# Altium PCB PCB1.PcbDoc
Units mil, origin at the board's own origin, x right, y up, seen from the top; angles counter-clockwise.
Board outline 6000 x 4000 mil, 2 copper layers (Top Layer, Bottom Layer); 22 components, 13 nets, 63 pads, 0 vias.
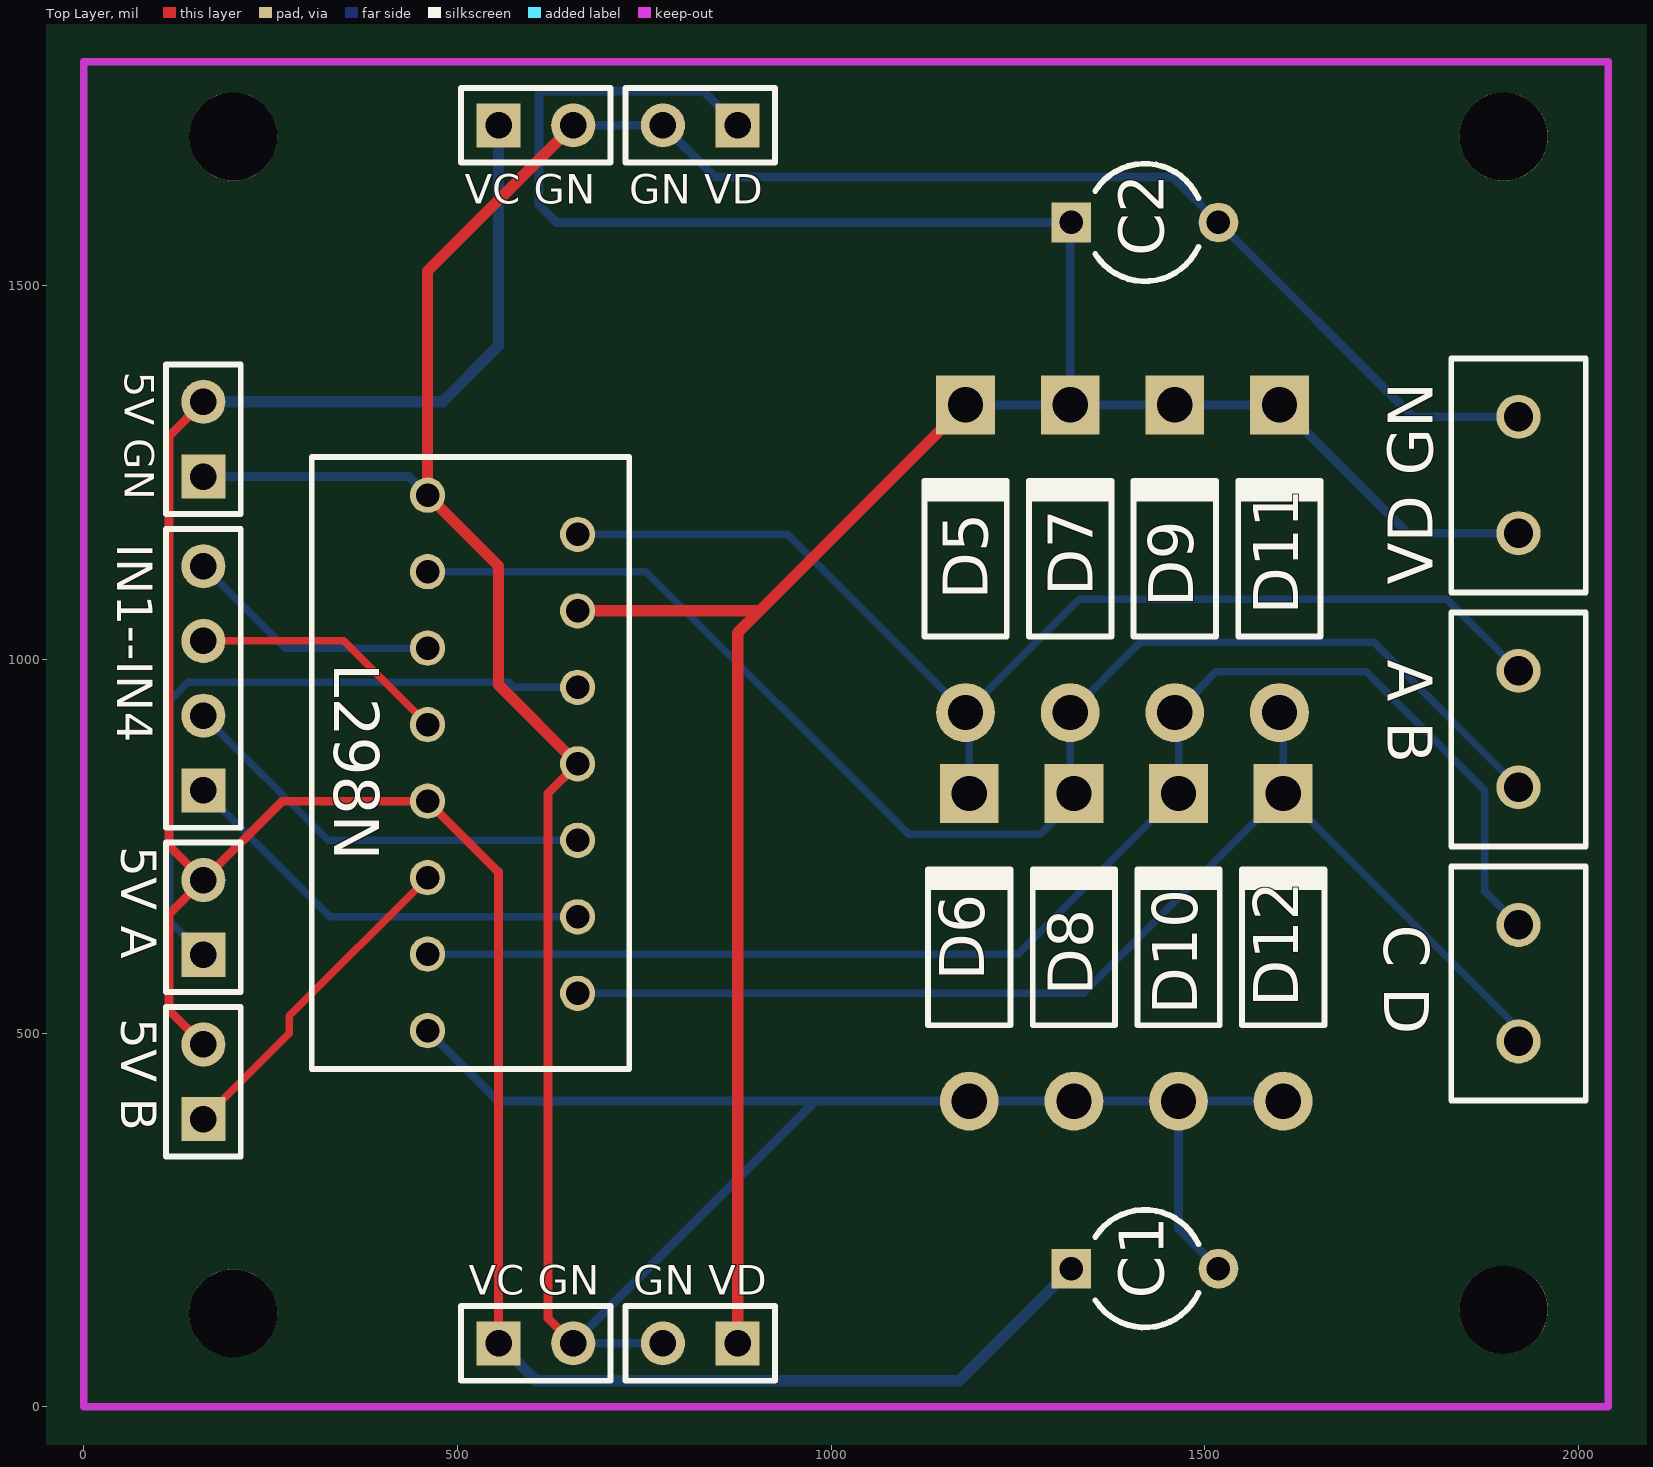
[diagram p0: Top Layer view]
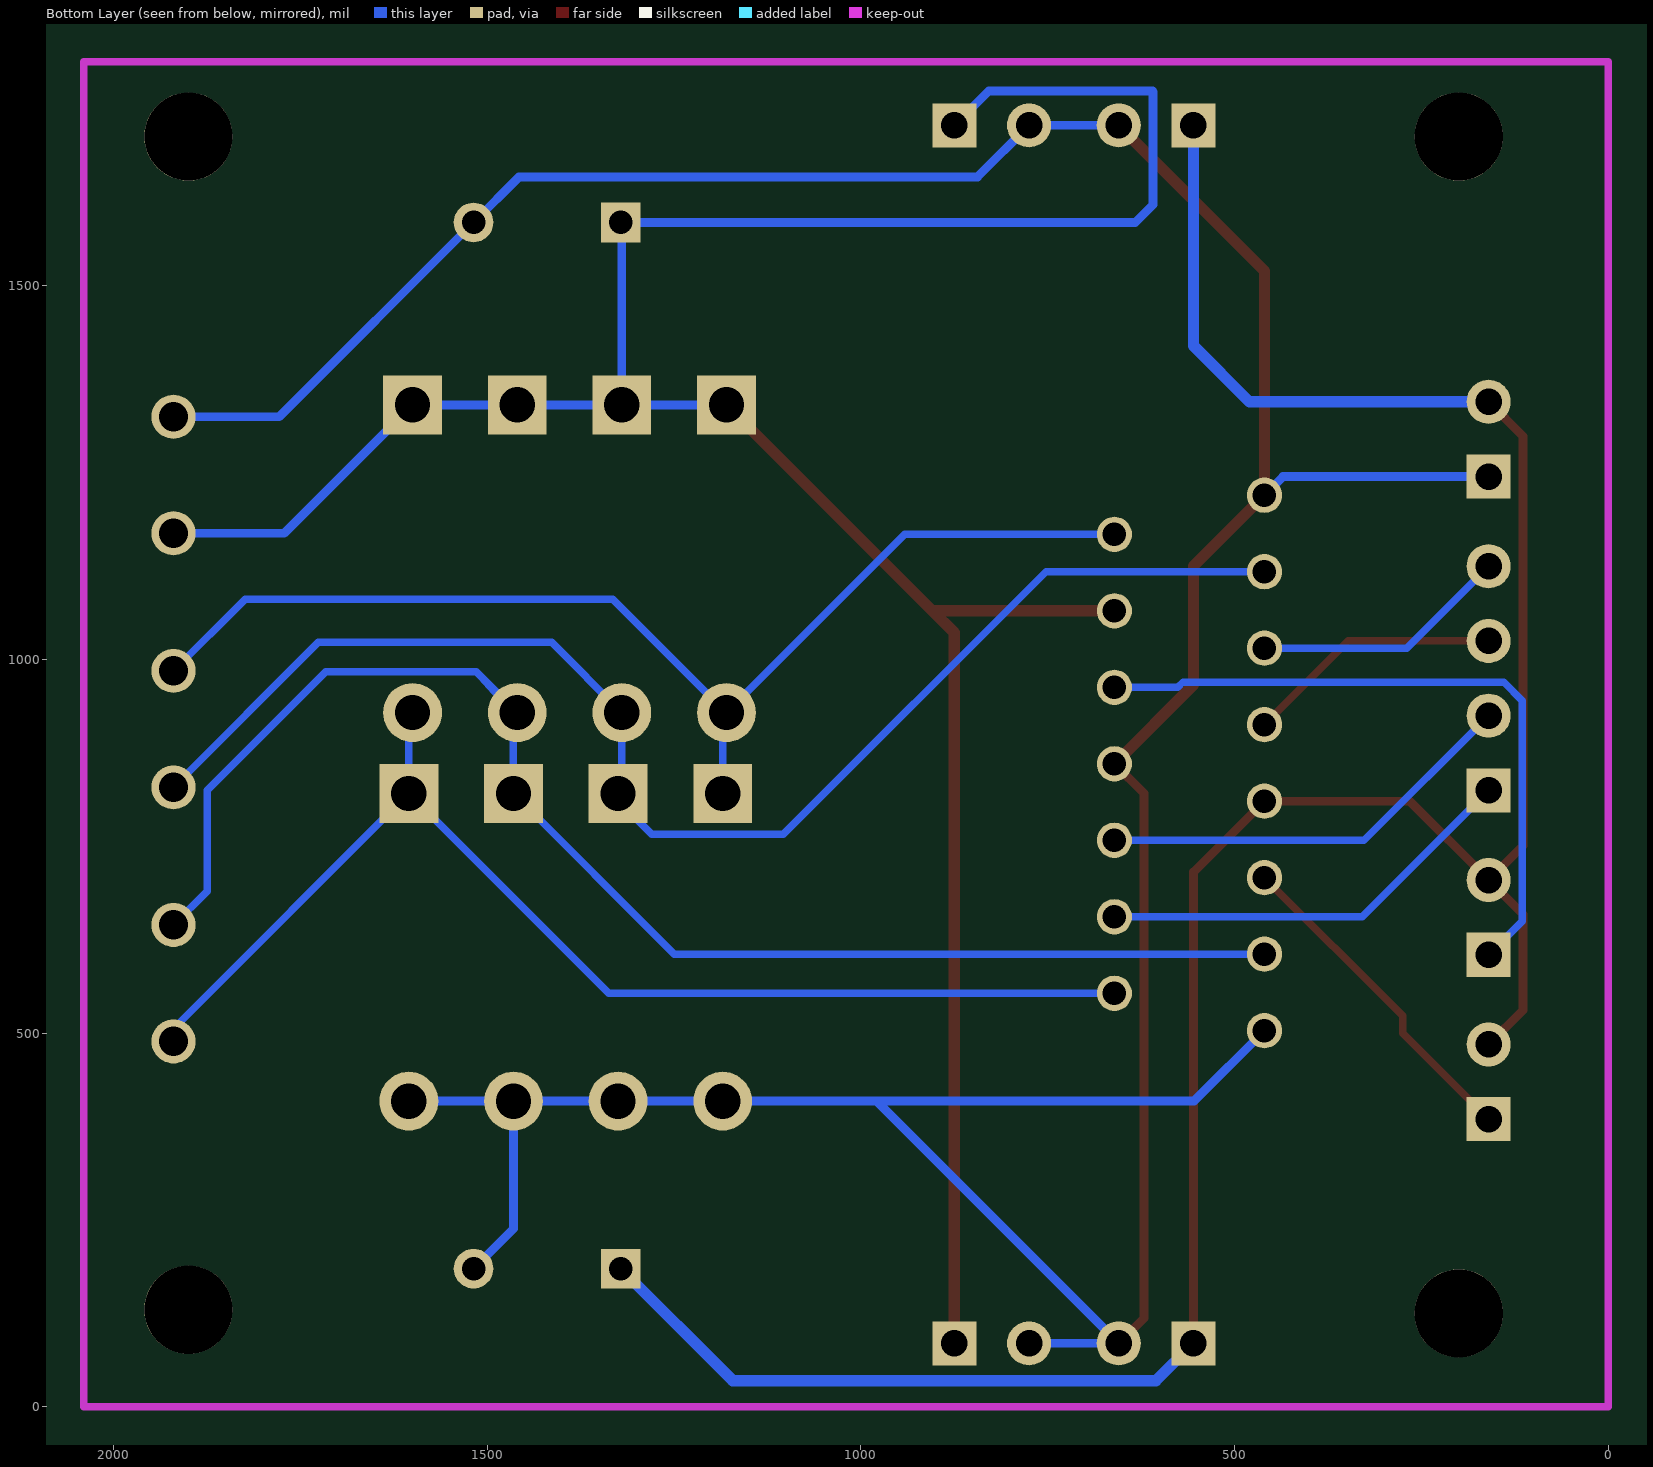
[diagram p1: Bottom Layer view, seen from below]

## Layer stack, top to bottom
Top Layer: signal copper 1.4
Dielectric: dielectric 12.6, FR-4, Dk 4.8
Bottom Layer: signal copper 1.4

## Board outline
-1400,-1300 4600,-1300 4600,2700 -1400,2700

## Design rules (kind name [scope] priority, off if disabled: settings)
Clearance [All] p1: gap=10
FabricationTestPointUsage TestPointUsage [All] p1: valid=0 allowmultiple=FALSE
FabricationTestpoint Testpoint [All] p1: side=3 testpointundercomponent=TRUE minsize=40 maxsize=100 preferedsize=60 minholesize=0 maxholesize=40 preferedholesize=32 testpointgrid=1 allowsidetop=TRUE allowsidebottom=TRUE usegrid=TRUE gridtolerance=0.01
PolygonConnect [All] p1: connectstyle=Relief reliefconductorwidth=10 reliefentries=4 polygonreliefangle="90 Angle" airgapwidth=10
RoutingVias [All] p1: holewidth=28 width=50 viastyle="Through Hole" minholewidth=28 minwidth=50 maxholewidth=28 maxwidth=50
SolderMaskExpansion [All] p1: expansion=4
Width Width_3 [InNet('+5V')] p1: maxlimit=15 minlimit=15 preferedwidth=15
Width Width_2 [InNet('GND')] p2: maxlimit=15 minlimit=15 preferedwidth=15
Width Width_1 [InNet('+12V')] p3: maxlimit=15 minlimit=15 preferedwidth=15
Width [All] p4: maxlimit=11.81 minlimit=10 preferedwidth=10 minimp=50.000000 maximp=50.000000 favimp=50.000000
26 further rules are at their usual default settings.

## Components (designator, comment, footprint, x,y, rotation, side; value= is the part's Value field where it differs from the comment)
"5V A" "COM2" HDR1X2 160,605 r90 top (schematic designator P6)
"5V B" "COM2" HDR1X2 160,385 r90 top (schematic designator P7)
"5V GN" "COM2" HDR1X2 160,1245 r90 top (schematic designator P3)
"A B" "COM2" DP3 1920,985 r0 top (schematic designator P5)
C1 "" CAPR5-4X5 1420,185 r0 top
C2 "" CAPR5-4X5 1420,1585 r0 top
"C D" "COM2" DP3 1920,645 r0 top (schematic designator P8)
D5 "1N4007" DO-41 1180,1135 r90 top
D6 "1N4007" DO-41 1185,615 r90 top
D7 "1N4007" DO-41 1320,1135 r90 top
D8 "1N4007" DO-41 1325,615 r90 top
D9 "1N4007" DO-41 1460,1135 r90 top
D10 "1N4007" DO-41 1465,615 r90 top
D11 "1N4007" DO-41 1600,1135 r90 top
D12 "1N4007" DO-41 1605,615 r90 top
"GN VD" "COM2" HDR1X2 875,85 r180 top (schematic designator P1)
"GN VD" "COM2" HDR1X2 875,1715 r180 top (schematic designator P11)
IN1--IN4 "COM" HDR1X4 160,825 r90 top (schematic designator P2)
L298N "L298N" "L298N - duplicate" 460,1220 r0 top (schematic designator U1)
"VC GN" "COM2" HDR1X2 555,85 r0 top (schematic designator P9)
"VC GN" "COM2" HDR1X2 555,1715 r0 top (schematic designator P10)
"VD GN" "COM2" DP3 1920,1325 r0 top (schematic designator P4)

## Footprints (in the part's own frame and the unit in brackets; to place one, negate y for a bottom-side part, rotate by r counter-clockwise, add the part's x,y. Pads: shape width x height; smd on the part's side, far side on the other; paste and mask are expansions set on the pad)
CAPR5-4X5 [mm] "Capacitor; 2 Leads"
  rect 1.35x1.35 hole 0.8: 1(-2.5,0)
  round 1.35 hole 0.8: 2(2.5,0)
  silkscreen extent -1.69,-2 1.82,2
DO-41 [mm] "Diode, Axial; Body 5.2 x 2.7 mm (LxDia. max), Lead Dia. 0.86 mm (max)"
  round 2 hole 1.2: 1(-5.23,0)
  rect 2x2 hole 1.2: 2(5.23,0)
  silkscreen extent -2.65,-1.41 2.75,1.4
DP3 [mm]
  round 1.5 hole 1: 1(0,0) 2(0,-3.96)
  silkscreen extent -2.29,-5.97 2.29,1.98
HDR1X2 [mm] "Connector; Header; 2 Position"
  rect 1.5x1.5 hole 0.9: 1(0,0)
  round 1.5 hole 0.9: 2(2.54,0)
  silkscreen extent -1.27,-1.27 3.81,1.27
HDR1X4 [mm] "Connector; Header; 4 Position"
  rect 1.5x1.5 hole 0.9: 1(0,0)
  round 1.5 hole 0.9: 2(2.54,0) 3(5.08,0) 4(7.62,0)
  silkscreen extent -1.27,-1.27 8.89,1.27
"L298N - duplicate" [mm]
  round 1.2 hole 0.8: 1(0,0) 2(5.1,-1.33) 3(0,-2.6) 4(5.1,-3.93) 5(0,-5.2) 6(5.1,-6.53) 7(0,-7.8) 8(5.1,-9.13) 9(0,-10.4) 10(5.1,-11.73) 11(0,-13) 12(5.1,-14.33) 13(0,-15.6) 14(5.1,-16.93) 15(0,-18.2)
  silkscreen extent -3.94,-19.5 6.86,1.3

## Part data
"5V A" "5V B" "5V GN" "A B" "C D" "GN VD" "GN VD" "VC GN" "VC GN" "VD GN": library part "Header 2", "Header, 2-Pin"
C1 C2: library part Cap2, "Capacitor"
D5 D6 D7 D8 D9 D10 D11 D12: library part "Diode 1N4007", "1 Amp General Purpose Rectifier"
IN1--IN4: library part "Header 4", "Header, 4-Pin"

## Free pads (board coordinates)
  round 118.11 hole 118.11: 0(1900,1700) 1(200,1700) 2(200,125) 3(1900,130)

## Nets (pads, with @x,y where several pads share a name; then routed paths per layer and width w, separated by ;. In a path a pad name is that pad's centre, name@x,y a point inside that pad or via, vN(x,y) a via of type N, cw(c..) or ccw(c..) an arc to the next point about the centre after c; other vN are vias at no path point)
+5V: "5V A.2" "5V B.2" "5V GN.2" "VC GN.1" C1.1 L298N.9 | length 3615.3
  Top Layer w11.81: 160,485 114,531 114,659 160,705 ; 160,1345 114,1299 114,751 160,705 ; 555,85 555,715.55 L298N.9 265.55,810.55 160,705
  Bottom Layer w15: 160,1345 480,1345 555,1420 555,1715 ; 555,85 605,35 1171.57,35 C1.1
+12V: "GN VD.1" "VD GN.2" C2.1 D5.2 D7.2 D9.2 D11.2 L298N.4 | length 3840.7
  Top Layer w15: L298N.4 904.37,1065.28 ; 875,85 875,1035.91 904.37,1065.28 ; D5.2 904.37,1065.28
  Bottom Layer w11.81: 875,1715 829,1761 610,1761 609,1760 609,1609 633,1585 C2.1 1320,1583.43 D7.2 ; D5.2 D7.2 ; 1920,1169.09 1771.81,1169.09 D11.2 D9.2 D7.2
GND: "5V GN.1" "GN VD.2" "VC GN.2" "VD GN.1" C1.2 C2.2 D6.1 D8.1 D10.1 D12.1 L298N.1 L298N.8 L298N.15 | length 5569.8
  Top Layer w11.81: 655,85 621.26,118.74 621.26,821.02 L298N.8
  Top Layer w15: 655,1715 460,1520 L298N.1 555,1125 555,966.34 L298N.8
  Bottom Layer w11.81: 160,1245 435,1245 L298N.1 ; L298N.15 554.37,409.09 979.09,409.09 ; 655,1715 775,1715 844,1646 1457.43,1646 C2.2 1778.43,1325 1920,1325 ; 775,85 655,85 979.09,409.09 ; C1.2 1465,238.43 D10.1 ; D12.1 D10.1 ; 979.09,409.09 D6.1 D8.1 D10.1
L298N_C: "C D.1" D9.1 D10.2 L298N.13 | length 1981.6
  Bottom Layer w10: L298N.13 1249.92,605.83 D10.2 D9.1@1465,929.09 ; D9.1 D9.1@1465,929.09 ; 1920,645 1875,690 1875,825 1716,984 1514.91,984 ; D9.1@1465,929.09 1465,934.09 1514.91,984 ; D9.1@1465,929.09 1514.91,984
L298N_D: "C D.2" D11.1 D12.2 L298N.14 | length 1627.5
  Bottom Layer w10: L298N.14 1337.56,553.46 D12.2 ; D11.1 1605,924.09 D12.2 ; 1920,489.09 1920,505.91 D12.2
NetD5_1: "A B.1" D5.1 D6.2 L298N.2 | length 1571
  Bottom Layer w10: L298N.2 941.46,1167.64 D5.1 ; D6.2 1185,924.09 D5.1 ; 1920,985 1824,1081 1331.91,1081 D5.1
NetD7_1: "A B.2" D7.1 D8.2 L298N.3 | length 1864.5
  Bottom Layer w10: L298N.3 752.36,1117.64 1104,766 1280,766 1320,806 1320,820.91 D7.1 1413.91,1023 1726.09,1023 1920,829.09
NetP2_1: IN1--IN4.1 L298N.12 | length 570.9
  Bottom Layer w10: IN1--IN4.1 329.17,655.83 L298N.12
NetP2_2: IN1--IN4.2 L298N.10 | length 569.9
  Bottom Layer w10: IN1--IN4.2 326.81,758.19 L298N.10
NetP2_3: IN1--IN4.3 L298N.7 | length 346.4
  Top Layer w10: IN1--IN4.3 347.91,1025 L298N.7
NetP2_4: IN1--IN4.4 L298N.5 | length 345.4
  Bottom Layer w10: IN1--IN4.4 269.72,1015.28 L298N.5
PWM_A: "5V A.1" L298N.6 | length 917.7
  Bottom Layer w10: 160,605 115,650 115,945 140,970 569,970 576.09,962.91 L298N.6
PWM_B: "5V B.1" L298N.11 | length 447.5
  Top Layer w10: 160,385 275,500 275,523.19 L298N.11

## Keep-outs
Keep-Out Layer:
  lines w10: 0,0 2040,0 2040,1800 0,1800 0,0